# Altium PCB solar_power.PcbDoc
Units mm, origin at the board's own origin, x right, y up, seen from the top; angles counter-clockwise.
Board outline 72.9 x 100 mm, 2 copper layers (Top Layer, Bottom Layer); 84 components, 44 nets, 237 pads, 491 vias.
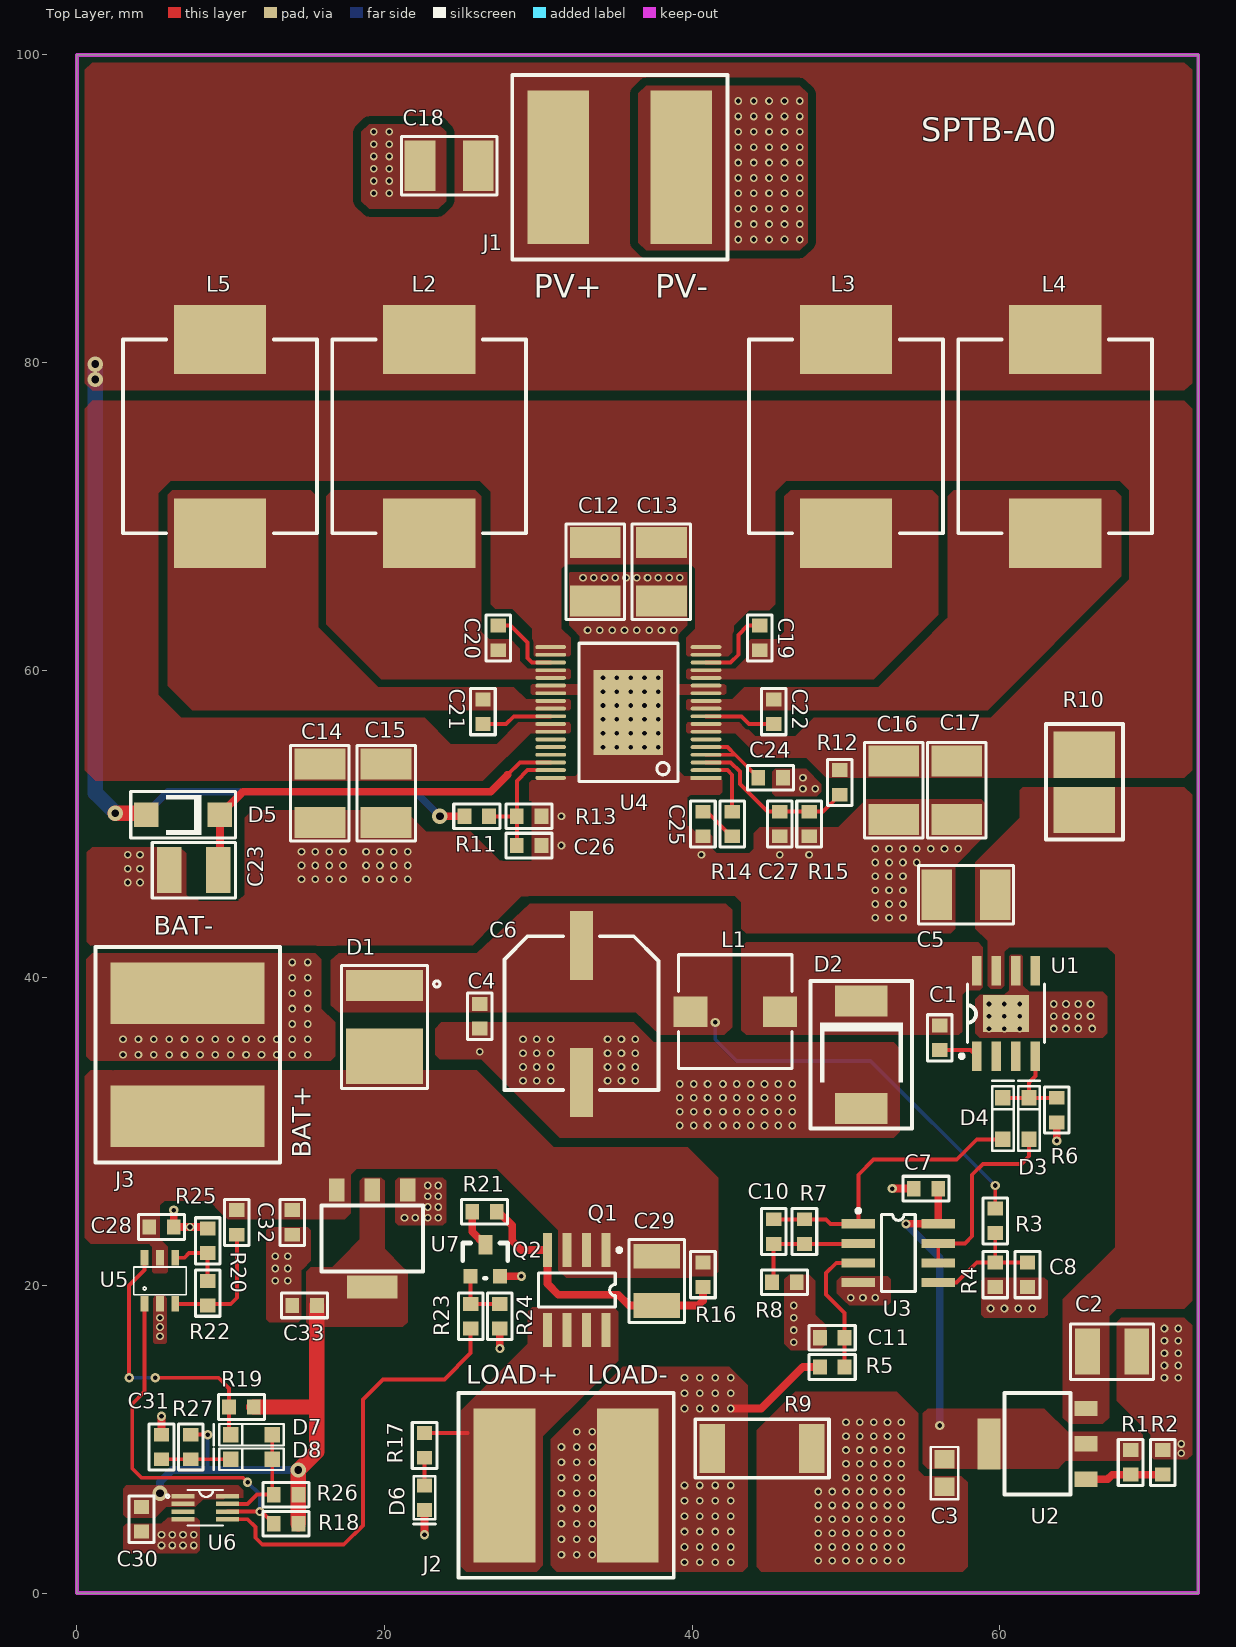
[diagram p0: Top Layer view]
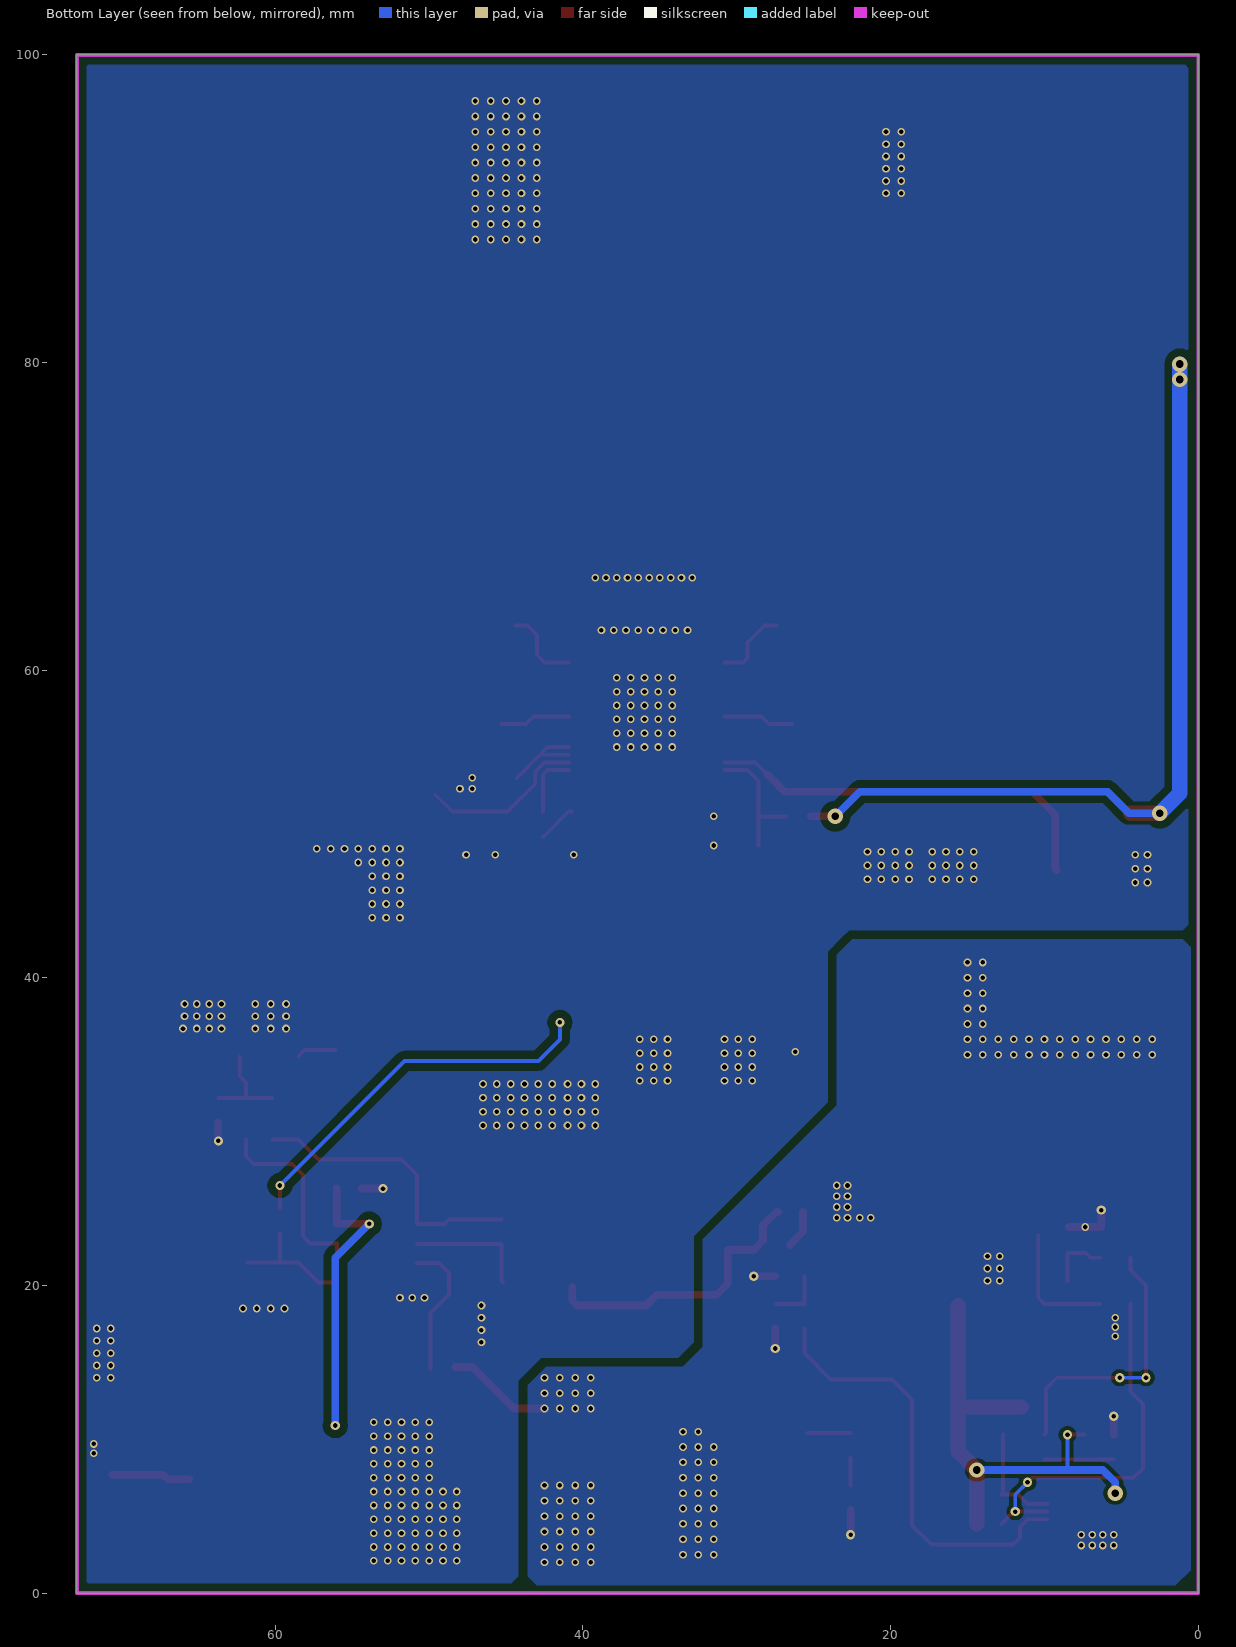
[diagram p1: Bottom Layer view, seen from below]

## Layer stack, top to bottom
Top Layer: signal copper 0.0356
Dielectric: dielectric 0.32, FR-4, Dk 4.8
Bottom Layer: signal copper 0.0356

## Board outline
0,0 72.9,0 72.9,100 0,100

## Design rules (kind name [scope] priority, off if disabled: settings)
Clearance Clearance_5 [InComponent('U1')] p1: gap=0.254
Clearance Clearance_2 [InComponent('U6')] p2: gap=0.127
Clearance Clearance_1 [InComponent('U4')] p3: gap=0.127
Clearance [All] p4: gap=0.254
ComponentClearance [All] p1: gap=0 collisioncheckmode=3 verticalgap=0 showdistances=FALSE
PolygonConnect [All] p1: connectstyle=Direct reliefconductorwidth=0.254 reliefentries=4 polygonreliefangle="90 Angle"
RoutingVias [All] p1: holewidth=0.3 width=0.6 viastyle="Through Hole" minholewidth=0.3 minwidth=0.6 maxholewidth=0.3 maxwidth=0.6
SilkscreenOverComponentPads [All] p1: minsilkscreentomaskgap=0.254
SolderMaskExpansion [All] p1: expansion=0.102
Width [All] p1: maxlimit=4 minlimit=0.254 preferedwidth=0.254 minimp=50.000000 maximp=50.000000 favimp=50.000000
26 further rules are at their usual default settings.

## Components (designator, comment, footprint, x,y, rotation, side; value= is the part's Value field where it differs from the comment)
C1 "0.01uF" 0603 56.1,36.1 r0 top
C2 "1uF/50V" 1210 68.9,15.7 r180 top
C3 "1uF/16V" 0805 56.4,6.9 r90 top
C4 "0.1uF" 0603 26.2,37.5 r180 top
C5 "4.7uF/50V" 1812 59.7,45.4 r180 top
C6 "220uF/50V" DL-10*10.5 32.8,37.7 r0 top
C7 "0.1uF" 0603 55.2,26.3 r90 top
C8 "220pF" 0603 61.8,20.7 r0 top
C10 "220pF" 0603 45.3,23.5 r180 top
C11 "0.1uF" 0603 49.1,16.6 r270 top
C12 "4.7uF/50V" 1812 33.7,64.5 r90 top
C13 "4.7uF/50V" 1812 38,64.5 r90 top
C14 "4.7uF/50V" 1812 15.8,50.1 r90 top
C15 "4.7uF/50V" 1812 20.1,50.1 r90 top
C16 "4.7uF/50V" 1812 53.1,50.3 r90 top
C17 "4.7uF/50V" 1812 57.2,50.3 r90 top
C18 "4.7uF/50V" 1812 22.3,92.8 r0 top
C19 "0.1uF" 0603 44.4,62.1 r180 top
C20 "0.1uF" 0603 27.4,62.1 r180 top
C21 "0.1uF" 0603 26.4,57.3 r180 top
C22 "0.1uF" 0603 45.3,57.3 r180 top
C23 "1uF/50V" 1210 6,47 r0 top
C24 "0.47uF" 0603 45.1,53 r90 top
C25 "0.022uF" 0603 40.7,50 r0 top
C26 "220pF" 0603 29.4,48.6 r270 top
C27 "220pF" 0603 45.7,50 r180 top
C28 "0.1uF" 0603 5.5,23.8 r270 top
C29 "1uF/50V" 1210 37.7,18.7 r90 top
C30 "0.1uF" 0603 4.2,4.8 r180 top
C31 "0.1uF" 0603 5.5,9.5 r180 top
C32 "0.1uF" 0603 14,24.1 r180 top
C33 "1uF/6.3V" 0603 14.8,18.7 r90 top
D1 "SPV1001N30" SPV1001 20,34.9 r0 top
D2 "MBR360" DO214AB 51,31.5 r90 top
D3 "1N5819HW" 1N5819 61.9,32.2 r270 top
D4 "1N5819HW" 1N5819 60.2,32.2 r270 top
D5 "STPS160U" B320A 4.5,50.6 r0 top
D6 "LED RED" LED0603 22.6,7 r0 top
D7 "1N5819HW" 1N5819 10,10.3 r0 top
D8 "1N5819HW" 1N5819 10,8.7 r0 top
J1 "PV" T-2PIN 31.3,92.7 r90 top
J2 "Voltage Output" T-2PIN 27.8,7 r90 top
J3 "Battery" T-2PIN 7.2,39 r0 top
L1 "8.2uH/3A" IND_8.2UH_3A 42.8,37.8 r90 top
L2 "47uH/3A" IND-47UH-3A 22.9,75.2 r270 top
L3 "47uH/3A" IND-47UH-3A 50,75.2 r90 top
L4 "47uH/3A" IND-47UH-3A 63.6,75.2 r90 top
L5 "47uH/3A" IND-47UH-3A 9.3,75.2 r270 top
Q1 "AO4435" SO8 32.5,19.7 r180 top
Q2 "S9014" NPN 25.6,20.6 r0 top
R1 "1K/1%" 0603 68.5,8.5 r0 top
R2 "8.2K/1%" 0603 70.6,8.5 r180 top
R3 "8.2K/1%" 0603 59.7,24.2 r0 top
R4 "1K/1%" 0603 59.7,20.7 r0 top
R5 "1K" 0603 49.1,14.7 r90 top
R6 "150K" 0603 63.7,31.4 r180 top
R7 "6.8K/1%" 0603 47.3,23.5 r180 top
R8 "1K/1%" 0603 46,20.2 r270 top
R9 "0.1/1W" 2512 41.3,9.4 r0 top
R10 "0" BREAK 65.5,54.5 r0 top
R11 "3.3M" 0603 26,50.5 r90 top
R12 "3.9M" 0603 49.6,52.7 r180 top
R13 "110K" 0603 29.4,50.5 r270 top
R14 "1K" 0603 42.6,50 r0 top
R15 "110K" 0603 47.6,50 r180 top
R16 "100K" 0603 40.7,20.7 r180 top
R17 "5.1K" 0603 22.6,9.6 r180 top
R18 "100K" 0603 13.6,4.5 r270 top
R19 "100K" 0603 10.7,12.1 r270 top
R20 "2M/1%" 0603 10.4,24.1 r0 top
R21 "10K" 0603 26.5,24.8 r90 top
R22 "10K/1%" 0603 8.5,19.5 r180 top
R23 "47K" 0603 25.6,18 r0 top
R24 "47K" 0603 27.5,18 r180 top
R25 "68K/1%" 0603 8.5,22.9 r180 top
R26 "100K" 0603 13.6,6.4 r270 top
R27 "100K" 0603 7.4,9.5 r0 top
U1 "LM22676MR-ADJ" PSO8 58.5,34.9 r0 top
U2 "LM317EMP" LM317 65.6,9.7 r90 top
U3 "LM258D" SO8 53.4,22.1 r270 top
U4 "SPV1020" POWERSSOP36 40.9,53 r180 top
U5 "TPS3700-Q1" SOT23-6 4.4,18.8 r0 top
U6 "NC7SZ74K8X" US8 7,6.3 r270 top
U7 "AMS1117-3.3" AMS1117 19.2,26.2 r180 top

## Footprints (in the part's own frame and the unit in brackets; to place one, negate y for a bottom-side part, rotate by r counter-clockwise, add the part's x,y. Pads: shape width x height; smd on the part's side, far side on the other; paste and mask are expansions set on the pad)
1N5819 [mm]
  rect 1x1 smd: 1(2.7,0) 2(0,0)
  silkscreen extent -1.1,-0.7 3.45,0.7
0603 [mm]
  rect 1x0.9 smd: 1(0,0.8) 2(0,-0.8)
  silkscreen extent -0.8,-1.5 0.8,1.5
0805 [mm]
  rect 1.2x1.3 smd: 1(0,0) 2(1.8,0)
  silkscreen extent -0.8,-0.9 2.6,0.9
1210 [mm]
  rect 1.6x3 smd: 1(0,0) 2(3.2,0)
  silkscreen extent -1.1,-1.8 4.3,1.8
1812 [mm]
  rect 2x3.3 smd: 1(0,0) 2(3.8,0)
  silkscreen extent -1.2,-1.9 5,1.9
2512 [mm]
  rect 1.65x3.2 smd: 1(0,0) 2(6.48,0)
  silkscreen extent -1.1,-1.9 7.6,1.9
AMS1117 [mm]
  rect 1x1.5 smd: 1(-2.3,0) 2(0,0) 3(2.3,0)
  rect 3.3x1.5 smd: 4(0,6.3)
  silkscreen extent -3.3,1 3.3,5.3
B320A [mm]
  rect 1.6x1.6 smd: 1(0,0) 2(4.8,0)
  silkscreen extent -1,-1.5 5.8,1.5
BREAK [mm]
  rect 4x3 smd: 1(0,0) 2(0,-3.6)
  silkscreen extent -2.5,-5.5 2.5,2
DL-10*10.5 [mm]
  rect 1.5x4.5 smd: 1(0,4.4) 2(0,-4.5)
  silkscreen extent -5,-5 5,5
DO214AB [mm]
  rect 2x3.4 smd: 1(7,0) 2(0,0)
  silkscreen extent -1.3,-3.3 8.3,3.3
IND-47UH-3A [mm]
  rect 4.5x6 smd: 1(-6.3,0) 2(6.3,0)
  silkscreen extent -6.3,-6.3 6.3,6.3
IND_8.2UH_3A [mm]
  rect 2x2.2 smd: 1(0,-2.9) 2(0,2.9)
  silkscreen extent -3.7,-3.7 3.7,3.7
LED0603 [mm]
  rect 1x0.9 smd: 1(0,0) 2(0,-1.6)
  silkscreen extent -0.7,-2.5 0.7,0.6
LM317 [mm]
  rect 1x1.5 smd: 1(-2.3,0) 2(2.3,0) 3(0,0)
  rect 3.3x1.5 smd: 3(0,6.3)
  silkscreen extent -3.3,1 3.3,5.3
NPN [mil]
  rect 36x50 smd: 1(38,80)
  rect 36x36 smd: 2(0,0) 3(75,0)
  silkscreen extent -20,-5 95,85
POWERSSOP36 [mm]
  rect 2x0.25 smd: 1(0,0)
  oval 2x0.25 smd: 2(0,-0.5) 3(0,-1) 4(0,-1.5) 5(0,-2) 6(0,-2.5) 7(0,-3) 8(0,-3.5) 9(0,-4) 10(0,-4.5) 11(0,-5) 12(0,-5.5) 13(0,-6) 14(0,-6.5) 15(0,-7) 16(0,-7.5) 17(0,-8) 18(0,-8.5) 19(10.1,-8.5) 20(10.1,-8) 21(10.1,-7.5) 22(10.1,-7) 23(10.1,-6.5) 24(10.1,-6) 25(10.1,-5.5) 26(10.1,-5) 27(10.1,-4.5) 28(10.1,-4) 29(10.1,-3.5) 30(10.1,-3) 31(10.1,-2.5) 32(10.1,-2) 33(10.1,-1.5) 34(10.1,-1) 35(10.1,-0.5) 36(10.1,0)
  rect 4.5x5.5 smd: ""(5.05,-4.25)
  silkscreen extent 1.84,-8.75 8.26,0.25
PSO8 [mm]
  rect 0.6x1.9 smd: 1(0,0) 2(1.27,0) 3(2.54,0) 4(3.81,0) 5(3.81,5.56) 6(2.54,5.56) 7(1.27,5.56) 8(0,5.56)
  rect 3x2.4 smd: 9(1.9,2.78)
  silkscreen extent -1.1,-0.11 4.4,4.7
SO8 [mm] "Small Outline; 8 Leads; Body Width 3.9 mm; Pitch 1.27 mm"
  rect 0.6x2.2 smd: 1(-1.905,-2.6) 2(-0.635,-2.6) 3(0.635,-2.6) 4(1.905,-2.6) 5(1.905,2.6) 6(0.635,2.6) 7(-0.635,2.6) 8(-1.905,2.6)
  silkscreen extent -2.88,-2.72 2.5,1.1
SOT23-6 [mm]
  rect 0.5x1 smd: 1(0,0) 2(1,0) 3(2,0) 4(2,3) 5(1,3) 6(0,3)
  silkscreen extent -0.7,0.6 2.7,2.4
SPV1001 [mm]
  rect 5x2 smd: 1(0,4.6)
  rect 5x3.6 smd: 2(0,0)
  silkscreen extent -2.8,-2.1 3.6,5.9
T-2PIN [mm]
  rect 10x4 smd: 1(0,0) 2(0,-8)
  silkscreen extent -6,-11 6,3
US8 [mm]
  rect 0.3x1.5 smd: 1(0,-0.1) 2(0.5,-0.1) 3(1,-0.1) 4(1.5,-0.1) 5(1.5,2.8) 6(1,2.8) 7(0.5,2.8) 8(0,2.8)
  silkscreen extent -0.4,-1.2 1.9,2.5

## Part data
C1 C2 C3 C4 C7 C8 C10 C11 C12 C13 C14 C15 C16 C17 C18 C19 C20 C21 C22 C23 C24 C25 C26 C27 C28 C30: library part Cap, "Capacitor"
C5: library part CAP, "Capacitor"
C6: library part "CAP WP"
C29 C31 C32 C33: library part "CAP NP_Dup2"
D1 D5: library part Diode, "Default Diode"
D2: library part 1N4148WS-7-F_SOD323-2
D3 D4 D7 D8: library part "Diode 11DQ03", "Schottky Rectifier"
D6: library part LN01401_1
J1 J2 J3: library part "Header 2", "Header, 2-Pin"
L1 L2 L3 L4 L5: library part 4.7UH_CDH2D09BNP-4R7MC_0.7A_20%
Q1: library part SI4431DY, "P-Channel 30V (D-S)  MOSFET"
Q2: library part MMBT3904_NL_SOT23-3
R1 R2 R3 R4 R5 R6 R7 R8 R9 R10 R11 R12 R13 R14 R15 R18 R19 R20 R22 R25 R26 R27: library part Res3, "Resistor"
R16 R17 R21 R23 R24: library part CR16-1003FM
U1: library part LM22670_0
U2: library part "LM317K STEEL", "3-Terminal Adjustable Regulator, 3-pin TO-3"
U3: library part LM258H, "Low Power Dual Operational Amplifier, 8-pin TO-99"
U6: library part NC7SZ74-US8_0, "IC;NC7SZ74,D-TYPE FLIP-FLOP,US8"
U7: library part LT1963EST-1_4.8

## Via types
v1: diameter 0.5, hole 0.3, Top Layer to Bottom Layer, tented both sides, 469 vias
v2: diameter 0.6, hole 0.3, Top Layer to Bottom Layer, tented both sides, 14 vias
v3: diameter 1, hole 0.5, Top Layer to Bottom Layer, tented both sides, 6 vias
v4: diameter 0.6, hole 0.3, Top Layer to Bottom Layer, 2 vias

## Nets (pads, with @x,y where several pads share a name; then routed paths per layer and width w, separated by ;. In a path a pad name is that pad's centre, name@x,y a point inside that pad or via, vN(x,y) a via of type N, cw(c..) or ccw(c..) an arc to the next point about the centre after c; other vN are vias at no path point)
+3.3V: C30.2 C33.2 R18.1 R19.1 R26.1 R27.1 U6.1 U6.2 U6.8 U7.2 U7.4 | length 32.3
  Top Layer w0.254: R27.1 v2(8.5,10.3)
  Top Layer w1: R19.1 15.6,12.1 ; R18.1 R26.1 v3(14.4,8) 15.6,9.2 15.6,12.1 ; C33.2 15.6,12.1
  Bottom Layer w0.254: v2(8.5,10.3) 8.5,8.104 8.6,8.004
  Bottom Layer w0.5: v3(5.4,6.5) 5.4,7.2 6.204,8.004 8.6,8.004 14.396,8.004 v3(14.4,8)
+12V: C3.2 C7.2 R1.1 U2.3 U3.8 | length 18.4
  Top Layer w0.5: v2(53.9,24) 53.905,24.005 U3.8 C7.2
  Bottom Layer w0.5: v2(53.9,24) 56.1,21.8 v2(56.1,10.9)
BGND: C28.1 C30.1 C31.2 C32.1 C33.1 D6.2 J2.2 J3.1 Q2.3 R5.1 R9.1 R24.1 R25.2 U5.2 U6.4 U7.1 | length 15.6
  Top Layer w0.5: C31.2 v4(5.5,11.5) ; v4(6.3,24.9) C28.1 v1(7.35,23.8) R25.2@8.4,23.8 ; v2(22.6,3.8) D6.2 ; v2(27.5,15.9) R24.1 ; Q2.3 v2(28.9,20.6) ; v1(42.5,12) 44.5,12 47.2,14.7 R5.1
  other v1: 39.5,2 40.5,2 41.5,2 42.5,2 31.5,2.5 32.5,2.5 33.5,2.5 39.5,3 40.5,3 41.5,3 42.5,3 5.5,3.1 6.2,3.1 6.9,3.1 7.6,3.1 31.5,3.5 32.5,3.5 33.5,3.5 5.5,3.8 6.2,3.8 6.9,3.8 7.6,3.8 39.5,4 40.5,4 41.5,4 42.5,4 31.5,4.5 32.5,4.5 33.5,4.5 39.5,5 40.5,5 41.5,5 42.5,5 31.5,5.5 32.5,5.5 33.5,5.5 39.5,6 40.5,6 41.5,6 42.5,6 31.5,6.5 32.5,6.5 33.5,6.5 39.5,7 40.5,7 41.5,7 42.5,7 31.5,7.5 32.5,7.5 33.5,7.5 31.5,8.5 32.5,8.5 33.5,8.5 31.5,9.5 32.5,9.5 33.5,9.5 32.5,10.5 33.5,10.5 39.5,12 40.5,12 41.5,12 39.5,13 40.5,13 41.5,13 42.5,13 39.5,14 40.5,14 41.5,14 42.5,14 5.4,16.7 5.4,17.3 5.4,17.9 12.9,20.3 13.7,20.3 12.9,21.1 13.7,21.1 12.9,21.9 13.7,21.9 21.3,24.4 22,24.4 22.8,24.4 23.5,24.4 22.8,25.1 23.5,25.1 22.8,25.8 23.5,25.8 22.8,26.5 23.5,26.5 3,35 4,35 5,35 6,35 7,35 8,35 9,35 10,35 11,35 12,35 13,35 14,35 15,35 3,36 4,36 5,36 6,36 7,36 8,36 9,36 10,36 11,36 12,36 13,36 14,36 15,36 14,37 15,37 14,38 15,38 14,39 15,39 14,40 15,40 14,41 15,41
CB4: C22.1 U4.9 | length 4.6
  Top Layer w0.254: U4.9 43.2,57 43.7,56.5 C22.1
CLR: R18.2 U5.1 U6.6 | length 24.5
  Top Layer w0.254: U5.1 4.4,13.1 3.6,12.3 3.6,8.1 4.2,7.5 10.8,7.5 v2(11.1,7.2) ; U6.6 v2(11.9,5.3) 12,5.3 R18.2
  Bottom Layer w0.254: v2(11.1,7.2) 11.9,6.4 v2(11.9,5.3)
FB: D3.2 D4.2 R6.2 U1.4 | length 6.4
  Top Layer w0.254: D4.2 D3.2 ; U1.4 62.31,33.61 61.9,33.2 D3.2 ; R6.2 D3.2
GND: C2.1 C3.1 C4.1 C5.2 C6.2 C7.1 C8.2 C11.2 C12.1 C13.1 C14.1 C15.1 C16.1 C17.1 C18.1 C23.1 C24.2 C25.2 C26.1 C27.1 D2.2 J1.2 R2.2 R4.2 R6.1 R8.1 R9.2 R13.1 R15.1 U1.6 U1.9 U3.4 U4. U4.1 U4.12 U4.13 U4.24 U4.25 U4.36 | length 2.6
  Top Layer w0.5: v2(53,26.3) C7.1 ; v2(63.7,29.4) R6.1
  other v1: 48.2,2.1 49.1,2.1 50,2.1 50.9,2.1 51.8,2.1 52.7,2.1 53.6,2.1 48.2,3 49.1,3 50,3 50.9,3 51.8,3 52.7,3 53.6,3 48.2,3.9 49.1,3.9 50,3.9 50.9,3.9 51.8,3.9 52.7,3.9 53.6,3.9 48.2,4.8 49.1,4.8 50,4.8 50.9,4.8 51.8,4.8 52.7,4.8 53.6,4.8 48.2,5.7 49.1,5.7 50,5.7 50.9,5.7 51.8,5.7 52.7,5.7 53.6,5.7 48.2,6.6 49.1,6.6 50,6.6 50.9,6.6 51.8,6.6 52.7,6.6 53.6,6.6 50,7.5 50.9,7.5 51.8,7.5 52.7,7.5 53.6,7.5 50,8.4 50.9,8.4 51.8,8.4 52.7,8.4 53.6,8.4 71.8,9.1 50,9.3 50.9,9.3 51.8,9.3 52.7,9.3 53.6,9.3 71.8,9.7 50,10.2 50.9,10.2 51.8,10.2 52.7,10.2 53.6,10.2 50,11.1 50.9,11.1 51.8,11.1 52.7,11.1 53.6,11.1 70.7,14 71.6,14 70.7,14.8 71.6,14.8 70.7,15.6 71.6,15.6 46.6,16.3 70.7,16.4 71.6,16.4 46.6,17.1 70.7,17.2 71.6,17.2 46.6,17.9 59.4,18.5 60.3,18.5 61.2,18.5 62.1,18.5 46.6,18.7 50.3,19.2 51.1,19.2 51.9,19.2 39.2,30.4 40.1,30.4 41,30.4 42,30.4 42.9,30.4 43.8,30.4 44.7,30.4 45.6,30.4 46.5,30.4 39.2,31.3 40.1,31.3 41,31.3 42,31.3 42.9,31.3 43.8,31.3 44.7,31.3 45.6,31.3 46.5,31.3 39.2,32.2 40.1,32.2 41,32.2 42,32.2 42.9,32.2 43.8,32.2 44.7,32.2 45.6,32.2 46.5,32.2 39.2,33.1 40.1,33.1 41,33.1 42,33.1 42.9,33.1 43.8,33.1 44.7,33.1 45.6,33.1 46.5,33.1 29,33.3 29.9,33.3 30.8,33.3 34.5,33.3 35.4,33.3 36.3,33.3 29,34.2 29.9,34.2 30.8,34.2 34.5,34.2 35.4,34.2 36.3,34.2 29,35.1 29.9,35.1 30.8,35.1 34.5,35.1 35.4,35.1 36.3,35.1 26.2,35.2 29,36 29.9,36 30.8,36 34.5,36 35.4,36 36.3,36 59.3,36.7 60.3,36.7 61.3,36.7 63.5,36.7 64.3,36.7 65.1,36.7 66,36.7 59.3,37.5 60.3,37.5 61.3,37.5 63.5,37.5 64.3,37.5 65.1,37.5 65.9,37.5 59.3,38.3 60.3,38.3 61.3,38.3 63.5,38.3 64.3,38.3 65.1,38.3 65.9,38.3 51.9,43.9 52.8,43.9 53.7,43.9 51.9,44.8 52.8,44.8 53.7,44.8 51.9,45.7 52.8,45.7 53.7,45.7 3.3,46.2 4.1,46.2 14.6,46.4 15.5,46.4 16.4,46.4 17.3,46.4 18.8,46.4 19.7,46.4 20.6,46.4 21.5,46.4 51.9,46.6 52.8,46.6 53.7,46.6 3.3,47.1 4.1,47.1 14.6,47.3 15.5,47.3 16.4,47.3 17.3,47.3 18.8,47.3 19.7,47.3 20.6,47.3 21.5,47.3 51.9,47.5 52.8,47.5 53.7,47.5 54.6,47.5 3.3,48 4.1,48 40.6,48 45.7,48 47.6,48 14.6,48.2 15.5,48.2 16.4,48.2 17.3,48.2 18.8,48.2 19.7,48.2 20.6,48.2 21.5,48.2 51.9,48.4 52.8,48.4 53.7,48.4 54.6,48.4 55.5,48.4 56.4,48.4 57.3,48.4 31.5,48.6 31.5,50.5 47.2,52.3 48,52.3 47.2,53 34.2,55 35.1,55 36,55 36.9,55 37.8,55 34.2,55.9 35.1,55.9 36,55.9 36.9,55.9 37.8,55.9 34.2,56.8 35.1,56.8 36,56.8 36.9,56.8 37.8,56.8 34.2,57.7 35.1,57.7 36,57.7 36.9,57.7 37.8,57.7 34.2,58.6 35.1,58.6 36,58.6 36.9,58.6 37.8,58.6 34.2,59.5 35.1,59.5 36,59.5 36.9,59.5 37.8,59.5 33.2,62.6 34,62.6 34.8,62.6 35.6,62.6 36.4,62.6 37.2,62.6 38,62.6 38.8,62.6 32.9,66 33.6,66 34.3,66 35,66 35.7,66 36.4,66 37.1,66 37.8,66 38.5,66 39.2,66 43,88 44,88 45,88 46,88 47,88 43,89 44,89 45,89 46,89 47,89 43,90 44,90 45,90 46,90 47,90 19.3,91 20.3,91 43,91 44,91 45,91 46,91 47,91 19.3,91.8 20.3,91.8 43,92 44,92 45,92 46,92 47,92 19.3,92.6 20.3,92.6 43,93 44,93 45,93 46,93 47,93 19.3,93.4 20.3,93.4 43,94 44,94 45,94 46,94 47,94 19.3,94.2 20.3,94.2 19.3,95 20.3,95 43,95 44,95 45,95 46,95 47,95 43,96 44,96 45,96 46,96 47,96 43,97 44,97 45,97 46,97 47,97
LX4: C22.2 L4.1 U4.10 U4.11
MPPT-OUT: C2.2 C5.1 R10.2 U1.7 U2.2
NetC1_1: C1.1 D2.1 L1.1 U1.8
NetC1_2: C1.2 U1.1 | length 2.6
  Top Layer w0.254: C1.2 58.1,35.3 U1.1
NetC8_1: C8.1 R3.2 R4.1 U3.5 | length 8.2
  Top Layer w0.254: U3.5 57.195,20.195 58.5,21.5 R4.1 ; R3.2 R4.1 ; C8.1 R4.1
NetC10_1: C10.1 R7.1 R8.2 U3.2 | length 8.1
  Top Layer w0.254: R8.2 45.3,20.3 C10.1 R7.1 50.765,22.7 U3.2
NetC10_2: C10.2 D4.1 R7.2 U3.1 | length 19.2
  Top Layer w0.254: C10.2 R7.2 48.7,24.3 48.995,24.005 U3.1 50.8,27.2 51.8,28.2 57.2,28.2 58.5,29.5 D4.1
NetC11_1: C11.1 R5.2 U3.3 | length 9.1
  Top Layer w0.254: R5.2@49.9,14.6 49.9,18.2 48.7,19.4 48.7,20.8 49.365,21.465 U3.3
NetC19_1: C19.1 L3.1 U4.14 U4.15
NetC19_2: C19.2 U4.16 | length 5.3
  Top Layer w0.254: U4.16 42.5,60.5 43,61 43,62.3 43.6,62.9 C19.2
NetC20_1: C20.1 L2.2 U4.22 U4.23
NetC20_2: C20.2 U4.21 | length 5
  Top Layer w0.254: C20.2 28.2,62.9 29.3,61.8 29.3,60.8 29.6,60.5 U4.21
NetC21_1: C21.1 U4.28 | length 4.6
  Top Layer w0.254: C21.1 27.9,56.5 28.4,57 U4.28
NetC21_2: C21.2 L5.2 U4.26 U4.27
NetC24_1: C24.1 U4.4 U4.5 | length 6.1
  Top Layer w0.254: U4.4 42.8,54.5 ; U4.5 42.3,55 42.8,54.5 ; C24.1 42.8,54.5
NetC25_1: C25.1 R14.2 | length 2.6
  Top Layer w0.254: C25.1 40.948,50.8 42.548,49.2 R14.2
NetC29_1: C29.1 Q1.4 R16.1 R21.2 | length 18.8
  Top Layer w0.5: R21.2 27.4,24.8 28.3,23.9 28.3,22.9 28.9,22.3 Q1.4 30.595,20.105 31.3,19.4 35.2,19.4 35.9,18.7 C29.1 40.4,18.7 40.7,19 R16.1
NetC31_1: C31.1 D8.2 R27.2 | length 4.5
  Top Layer w0.254: C31.1 D8.2
NetD3_1: D3.1 U3.6 U3.7 | length 13
  Top Layer w0.254: U3.6 U3.7 57.735,22.735 58.2,23.2 58.2,27.2 58.9,27.9 61.4,27.9 61.9,28.4 D3.1
NetD6_1: D6.1 R17.1 | length 1.8
  Top Layer w0.254: D6.1 R17.1
NetD7_1: D7.1 D8.1 R26.2 U6.7 | length 7.2
  Top Layer w0.254: U6.7 11.1,5.8 11.7,6.4 R26.2 12.7,6.5 D8.1 D7.1
NetJ2_1: J2.1 Q1.5 Q1.6 Q1.7 Q1.8 R17.2 | length 2.8
  Top Layer w0.254: R17.2 25.4,10.4
NetQ2_1: Q2.1 R21.1 | length 2.5
  Top Layer w0.5: R21.1 25.7,23.497 Q2.1
NetQ2_2: Q2.2 R23.1 R24.2 | length 3.7
  Top Layer w0.254: Q2.2 R23.1 R24.2
NetR1_2: R1.2 R2.1 U2.1 | length 5.1
  Top Layer w0.5: U2.1 67,7.4 67.3,7.7 R2.1
NetR14_1: R14.1 U4.2 | length 4.2
  Top Layer w0.254: U4.2 42.3,53.5 42.6,53.2 R14.1
NetR20_2: R20.2 R22.1 U5.3 | length 8.3
  Top Layer w0.254: U5.3 10,18.8 10.4,19.2 R20.2
NetR22_2: R22.2 R25.1 U5.4 | length 4
  Top Layer w0.254: U5.4 7,21.8 7.3,22.1 R25.1 R22.2
OUTB: D7.2 R19.2 U5.6 | length 18
  Top Layer w0.254: v2(3.4,14) 3.4,20 4.4,21 U5.6 ; v2(5.1,14) 9.2,14 9.9,13.3 R19.2 9.9,10.4 D7.2
  Bottom Layer w0.254: v2(3.4,14) v2(5.1,14)
PWR-CTL: R23.2 U6.5 | length 28.5
  Top Layer w0.254: U6.5 11.1,4.8 11.6,4.3 11.6,3.6 12.05,3.15 17.35,3.15 18.6,4.4 18.6,12.6 19.9,13.9 23.9,13.9 25.6,15.6 R23.2
VBAT: C28.2 C29.2 C32.2 D1.2 J3.2 Q1.1 Q1.2 Q1.3 R16.2 R20.1 U5.5 U7.3
VCC: C23.2 D5.2 U4.34 | length 26.5
  Top Layer w0.254: 28,53.2 28.8,54 U4.34
  Top Layer w0.5: C23.2 9.3,47.1 D5.2 10.8,52.1 26.9,52.1 28,53.2
VIN: C18.2 D5.1 J1.1 L2.1 L3.2 L4.2 L5.1 R11.1 | length 55.6
  Top Layer w0.5: v3(23.6,50.5) R11.1
  Top Layer w1: v3(2.5,50.7) D5.1@4.4,50.7
  Bottom Layer w0.5: v3(2.5,50.7) 4.5,50.7 5.9,52.1 22,52.1 v3(23.6,50.5)
  Bottom Layer w1: v3(1.2,79.9) 1.2,52 v3(2.5,50.7)
  other v3: 1.2,78.9
VIN-SNS: C26.2 R11.2 R13.2 U4.35 | length 8.5
  Top Layer w0.254: R11.2 R13.2 ; C26.2 R13.2 ; U4.35 29.3,53.5 28.6,52.8 R13.2
VOUT: C12.2 C13.2 C14.2 C15.2 C16.2 C17.2 R10.1 R12.2 U4.7 U4.8 U4.17 U4.18 U4.19 U4.20 U4.29 U4.30
VOUT-SNS: C27.2 R12.1 R15.2 U4.3 | length 10.9
  Top Layer w0.254: U4.3 42.5,54 43.1,53.4 43.1,52.6 44.9,50.8 C27.2 R15.2 48.5,50.8 R12.1
VREG: C4.2 C6.1 D1.1 L1.2 R3.1 | length 24.7
  Top Layer w0.254: R3.1 v2(59.7,26.5)
  Bottom Layer w0.254: v2(41.5,37.1) 41.5,36 42.9,34.6 51.6,34.6 v2(59.7,26.5)
pads on no net: U1.2 U1.3 U1.5 U4.6 U4.31 U4.32 U4.33 U6.3

## Polygon pours and split planes (outlines as drawn)
+12V on Top Layer "Top Layer-No Net" (solid, remove dead copper, pour order 51): 55.7,8.1 60.6,8.1 60.9,8.4 60.9,10.1 60.9,11.7 60.6,12 55.3,12 55,11.7 55,8.4 55.3,8.1
VREG on Top Layer "Top Layer-No Net" (solid, remove dead copper, pour order 48): 42.6,36.783 42.6,44.414 42.182,44.8 37.484,44.8 29.446,44.8 26,41.613 17.022,41.613 17.022,41.612 16.5,41.13 16.5,38.232 17.022,37.749 36.336,37.749 37.902,36.3 42.078,36.3
NetC1_1 on Top Layer "Top Layer-No Net" (solid, remove dead copper, pour order 46): 56.197,36.3 57.34,36.3 57.548,36.5 57.548,38.9 57.756,39.1 57.86,39.2 58.484,39.2 58.692,39.2 58.9,39.4 58.9,42 58.588,42.3 43.512,42.3 43.2,42 43.2,36.6 43.512,36.3
MPPT-OUT on Top Layer "Top Layer-No Net" (solid, remove dead copper, pour order 44): 63.2,52.4 72,52.4 72.5,51.9 72.5,42 72.5,19 72,18.5 67.6,18.5 67.1,18 67.1,11.4 66.7,11 64.8,11 64.5,11 64.1,11.4 64.1,19.1 67.5,22.5 67.5,41.5 67,42 60.6,42 60.3,41.7 60.3,39.5 60.1,39.3 59.5,39.3 59.4,39.3 59.2,39.5 59.2,42.4 58.4,43.2 58.4,47.5 59.8,48.9 61.3,50.4 61.3,51.5 61.3,52.2 61.5,52.4
GND on Top Layer "Top Layer-No Net" (solid, remove dead copper, pour order 41): 37.8,98 47,98 47.5,97.5 47.5,87.8 47,87.3 37,87.3 36.5,87.8 36.5,97.5 37,98
GND on Top Layer "Top Layer-No Net" (solid, remove dead copper, pour order 42): 20.5,95.5 23.5,95.5 24,95 24,90.5 23.5,90 19,90 18.5,90.5 18.5,95 19,95.5
VIN on Top Layer "Top Layer-No Net" (solid, remove dead copper, pour order 43): 1,99.5 0.5,99.047 0.5,78.653 1,78.2 72,78.2 72.5,78.653 72.5,99.047 72,99.5
NetC21_2 on Top Layer "Top Layer-No Net" (solid, remove dead copper, pour order 49): 30,58.1 32,58.1 32.1,58 32.1,57.5 32,57.4 27.1,57.4 7.5,57.4 5.9,59 5.9,71.4 6.2,71.7 15.2,71.7 15.7,71.2 15.7,69.2 15.7,62.8 19.6,58.9 28.4,58.9 29.2,58.1
NetC20_1 on Top Layer "Top Layer-No Net" (solid, remove dead copper, pour order 52): 30,60.1 31.8,60.1 32,60.1 32.1,60 32.1,59.5 32,59.4 19.8,59.4 18.1,61.1 16.2,63 16.2,69.6 16.2,71.3 16.6,71.7 25.9,71.7 26.3,71.3 26.3,62.5 26.8,62 28.2,62 28.7,61.5 28.8,61.4 28.8,60.6 29.3,60.1
NetC19_1 on Top Layer "Top Layer-No Net" (solid, remove dead copper, pour order 54): 40.5,60.1 42.8,60.1 43.1,60.4 43.6,60.9 43.6,61.7 43.6,61.8 43.8,62 44.8,62 45.5,62 46,62.5 46,71.3 46.4,71.7 55.6,71.7 56,71.3 56,63.6 51.8,59.4 39.7,59.4 39.6,59.5 39.6,60 39.7,60.1
LX4 on Top Layer "Top Layer-No Net" (solid, remove dead copper, pour order 56): 40.3,58.1 42.5,58.1 42.6,58.1 43.4,58.9 43.7,58.9 52.1,58.9 54.7,61.5 56.5,63.3 56.6,63.4 56.6,63.9 56.6,71.3 56.9,71.6 57,71.7 67.4,71.7 67.5,71.7 67.9,71.3 67.9,66.1 59.2,57.4 41.1,57.4 39.7,57.4 39.6,57.5 39.6,58 39.7,58.1
VOUT on Top Layer "Top Layer-No Net" (solid, remove dead copper, pour order 58): 29.9,56.6 32,56.6 32.1,56.5 32.1,56 32,55.9 29.7,55.9 29.5,55.9 26.4,52.8 1.2,52.8 0.5,53.5 0.5,55.8 0.5,57.7 0.5,77 1,77.5 2.7,77.5 4,77.5 13.6,77.5 15,77.5 24.6,77.5 32.3,77.5 72,77.5 72.5,77 72.5,53.5 72,53 48.7,53 47.4,54.3 45.2,54.3 44.4,54.3 42.8,55.9 39.7,55.9 39.6,56 39.6,56.5 39.7,56.6 42.7,56.6 43.2,56.6 44.1,55.7 46.7,55.7 47.9,56.9 59.3,56.9 59.4,56.9 60.2,57.7 68.4,65.9 68.4,67.3 68.4,71.3 68.4,71.7 67.8,72.3 65.2,72.3 58.2,72.3 46.1,72.3 45.4,71.6 45.4,70.9 45.4,68.9 45.4,64.3 45,63.9 43.7,63.9 42.7,62.9 42.7,61.1 42.5,60.9 39.9,60.9 39.7,60.9 39.6,61 39.6,61.5 39.6,62.1 40.2,62.7 40.2,66.6 39.9,66.9 31.8,66.9 31.5,66.6 31.5,62.7 32.1,62.1 32.1,61 32,60.9 29.7,60.9 29.6,61 29.6,61.1 29.6,62.7 28.4,63.9 28.3,64 27.2,64 26.9,64.3 26.9,71.6 26.2,72.3 6.1,72.3 5.3,71.5 5.3,58.4 6.7,57 6.8,56.9 7.7,56.9 22.6,56.9 24.3,55.2 26.7,55.2 27.3,55.2 28.7,56.6
+12V on Top Layer "Top Layer-No Net" (solid, remove dead copper, pour order 45): 60.6,12 62.4,12 62.9,12 64.4,10.5 65,10.5 68.6,10.5 69,10.5 69.1,10.5 69.3,10.3 69.3,9.3 69.3,8.8 69.1,8.6 64.3,8.6 64.1,8.4 63.8,8.1 60.6,8.1
NetJ2_1 on Top Layer "Top Layer-No Net" (solid, remove dead copper, pour order 47): 30.4,18.6 34.9,18.6 35.1,18.4 35.2,18.3 35.2,16.9 35.2,15.1 34.6,14.5 33.4,13.3 30.3,10.2 30.3,9.7 30.3,1.8 29.9,1.4 25.3,1.4 25,1.7 25,8.7 25,11.9 29.1,16 29.3,16.2 29.3,16.7 29.3,18.3 29.6,18.6
VBAT on Top Layer "Top Layer-No Net" (solid, remove dead copper, pour order 50): 21.5,34 26,34 31,29 34.5,29 35,28.5 35,21 34.5,20.5 33.4,20.5 31.8,20.5 31.3,21 31.3,23.6 29,25.9 27.3,27.6 24.2,27.6 19.9,27.6 18.2,27.6 17.8,27.2 17.8,26.6 17.8,24.7 17.4,24.3 9.8,24.3 9.4,24.7 8.6,25.5 5.8,25.5 5.7,25.5 5.4,25.2 5.4,24.1 5.4,23 5.6,22.8 5.9,22.5 5.9,22.2 5.9,20.9 5.8,20.8 5.7,20.8 5,20.8 4.9,20.9 4.9,22.5 4.7,22.7 3.9,22.7 2.3,22.7 1.9,23.1 1.9,33.5 2.4,34
+3.3V on Top Layer "Top Layer-No Net" (solid, remove dead copper, pour order 53): 16.2,21.2 20.8,21.2 21.2,21.2 21.5,20.9 21.5,17.6 21.2,17.3 19.7,17.3 15.2,17.3 14.9,17.6 14.9,20.9 15.2,21.2
+3.3V on Top Layer "Top Layer-No Net" (solid, remove dead copper, pour order 55): 5.8,7 9.7,7 10.5,7 10.8,6.7 10.8,6.2 10.7,6.1 10,6.1 8.2,6.1 7.7,5.6 5.8,5.6 5.1,4.9 3.9,4.9 3.2,4.9 3,5.1 3,6.8 3.2,7
BGND on Top Layer "Top Layer-No Net" (solid, remove dead copper, pour order 59): 8.4,41.6 15.5,41.6 15.9,41.2 15.9,38 16.7,37.2 16.8,37.1 16.8,36.4 16.8,34.9 16.5,34.6 2.5,34.6 2.2,34.9 1.9,35.2 1.9,41.3 2.2,41.6
BGND on Top Layer "Top Layer-No Net" (solid, remove dead copper, pour order 60): 35.5,14.7 30.8,10 30.8,9 30.8,1.8 31,1.6 31.2,1.4 43.3,1.4 43.6,1.7 43.6,13.5 42.4,14.7 35.5,14.7
+3.3V on Top Layer "Top Layer-No Net" (solid, remove dead copper, pour order 61): 18.7,27 19.8,27 20,26.8 20,22.7 20,22.4 21.2,21.2 21.5,20.9 16.6,20.9 16.6,21.2 17.4,22 18.2,22.8 18.4,23 18.4,26.8 18.6,27
BGND on Top Layer "Top Layer-No Net" (solid, remove dead copper, pour order 62): 21.3,27 23.1,27 23.8,27 24,26.8 24,24.1 23.8,23.9 20.9,23.9 20.7,24.1 20.7,26.8 20.9,27
BGND on Top Layer "Top Layer-No Net" (solid, remove dead copper, pour order 63): 13.5,23.8 15,23.8 15.2,23.6 15.2,21.8 15.2,21.6 14.7,21.1 14.6,21 14.6,19.1 14.6,17.8 14.4,17.6 13,17.6 12.5,17.6 12.3,17.8 12.3,23.6 12.5,23.8
BGND on Top Layer "Top Layer-No Net" (solid, remove dead copper, pour order 64): 5.25,19.4 5.55,19.4 5.65,19.4 5.75,19.286 5.85,19.171 5.85,18.371 5.85,16.314 5.75,16.2 5.45,16.2 5.05,16.2 4.95,16.314 4.95,19.171 5.05,19.286 5.15,19.4
BGND on Top Layer "Top Layer-No Net" (solid, remove dead copper, pour order 65): 5.9,4.9 7.8,4.9 8,4.7 8,2.8 7.8,2.6 3.4,2.6 3.2,2.6 3,2.8 3,4.3 3.2,4.5 5.5,4.5 5.9,4.9
BGND on Top Layer "Top Layer-No Net" (solid, remove dead copper, pour order 67): 2.2,41.6 1.2,41.6 1,41.6 0.6,41.2 0.6,35 0.6,34.9 0.9,34.6 2.5,34.6 2.5,41.6
VBAT on Top Layer "Top Layer-No Net" (solid, remove dead copper, pour order 68): 2.4,34 0.9,34 0.5,33.6 0.5,23.1 0.9,22.7 2.3,22.7
GND on Top Layer "Top Layer-No Net" (solid, remove dead copper, pour order 69): 1.9,48.5 1.2,48.5 1,48.5 0.5,48 0.5,43.8 0.5,42.8 0.5,42.7 0.5,42.6 0.5,42.5 0.9,42.1 1,42.1 6.1,42.1 25.7,42.1 27.1,43.5 28.9,45.3 30.7,45.3 42.7,45.3 42.8,45.3 43.2,44.9 43.2,43.2 43.5,42.9 56.8,42.9 57.1,43.2 57.1,47.3 59.1,49.3 59.1,51.2 59.1,51.3 58.8,51.6 51.3,51.6 51,51.3 49.5,49.8 48.6,49.8 44.4,49.8 44,49.4 44,48.5 44,48.4 43.7,48.1 41.6,48.1 41.3,48.4 41.3,48.9 41.3,49.2 41,49.5 40.3,49.5 40.2,49.5 39.9,49.8 39.7,50 39.7,51.6 39.7,51.7 39.9,51.9 41.5,51.9 41.8,51.9 42,52.1 42,52.8 42,53 41.9,53.1 39.9,53.1 39.5,53.1 39.3,53.3 39.2,53.4 39.1,53.5 39.1,57.3 39.1,62.3 39.8,63 39.8,64.2 39.8,66.3 39.6,66.5 36.3,66.5 32.2,66.5 32,66.3 32,62.9 32.3,62.6 32.7,62.2 32.7,53.4 32.4,53.1 29.7,53.1 29.4,52.8 29.4,52.5 29.4,48 29,47.6 27.5,47.6 26.5,48.6 25.6,49.5 22.9,49.5 22.7,49.5 21.3,50.9 16,50.9 11.4,50.9 10.9,50.4 10.9,45.4 10.6,45.1 7.4,45.1 7.1,45.4 7.1,46.5 7.1,48.1 6.7,48.5
GND on Top Layer "Top Layer-No Net" (solid, remove dead copper, pour order 70): 30.1,59.1 32.4,59.1 33,59.1 33,58.4 29.6,58.4 29.5,58.5 29.5,58.9 29.5,59 29.6,59.1
GND on Top Layer "Top Layer-No Net" (solid, remove dead copper, pour order 71): 40.6,59.1 42,59.1 42.1,59.1 42.2,59 42.2,58.8 42.2,58.5 42.1,58.4 41.7,58.4 38.6,58.4 38.6,59.1
GND on Top Layer "Top Layer-No Net" (solid, remove dead copper, pour order 72): 45.9,53.6 47.4,53.6 48.4,52.6 48.4,52.2 48.4,52.1 48.2,51.9 48.1,51.8 47,51.8 45.4,51.8 45.2,52 45.2,53.3 45.2,53.4 45.4,53.6
GND on Top Layer "Top Layer-No Net" (solid, remove dead copper, pour order 73): 25.7,37.1 24,37.1 23.7,37.1 23.3,36.7 23.3,36.1 23.3,35 23.6,34.7 26.3,34.7 28.2,32.8 31.4,29.6 31.7,29.6 53.1,29.6 53.5,30 53.5,35.4 53.1,35.8 37.5,35.8 36.3,37 36.2,37.1 35.6,37.1
VBAT on Top Layer "Top Layer-No Net" (solid, remove dead copper, pour order 74): 34.5,29 39.7,29 41.7,27 41.7,21.6 41.7,20.9 41.3,20.5 35.9,20.5 34.5,20.5
GND on Top Layer "Top Layer-No Net" (solid, remove dead copper, pour order 75): 61,41.5 61.4,41.5 61.5,41.4 61.5,40.7 61.5,39.5 61.9,39.1 66,39.1 66.7,39.1 67,38.8 67,36.4 66.7,36.1 58.7,36.1 58.4,36.4 58.4,38.6 58.7,38.9 60.1,38.9 60.3,38.9 60.6,39.2 60.6,41.4 60.7,41.5
GND on Top Layer "Top Layer-No Net" (solid, remove dead copper, pour order 76): 46.7,20.7 47.4,20.7 47.6,20.7 48,20.3 48,19.5 48,18.1 48.7,17.4 48.7,16.7 48.7,16.2 48.4,15.9 48.3,15.8 47.2,15.8 46.4,15.8 46,16.2 46,20.1 46,20.4 46.3,20.7
GND on Top Layer "Top Layer-No Net" (solid, remove dead copper, pour order 77): 49.8,20.6 52.1,20.6 52.7,20.6 52.9,20.4 52.9,19.3 52.9,18.9 52.7,18.7 50.4,18.7 50.2,18.7 49.9,19 49.4,19.5 49.4,19.9 49.4,20.3 49.7,20.6
GND on Top Layer "Top Layer-No Net" (solid, remove dead copper, pour order 78): 59.4,20.5 62.9,20.5 63.1,20.3 63.1,18.9 63.1,18.1 62.9,17.9 62,17.9 59,17.9 58.8,18.1 58.8,19.6 58.8,20.3 59,20.5
GND on Top Layer "Top Layer-No Net" (solid, remove dead copper, pour order 79): 68.1,17.9 70,17.9 72,17.9 72.1,17.8 72.5,17.4 72.5,17.3 72.5,9 72.2,8.7 70,8.7 69.8,8.9 69.8,10.3 69.1,11 67.6,12.5 67.6,17.4 67.6,17.6 67.9,17.9
GND on Top Layer "Top Layer-No Net" (solid, remove dead copper, pour order 80): 47.5,13.1 51.6,13.1 53.3,13.1 54.7,11.7 54.7,9.7 54.7,8 55.1,7.6 57.4,7.6 57.5,7.6 57.9,7.2 57.9,1.7 57.6,1.4 44.5,1.4 44.2,1.7 44.2,10.6 46.7,13.1
BGND on Bottom Layer "Top Layer-No Net" (solid, remove dead copper, pour order 57): 0.5,42 1,42.5 15.9,42.5 22.5,42.5 23.5,41.5 23.5,31.7 27.2,28 32.2,23 32.2,19.2 32.2,16 33.5,14.7 42.4,14.7 43.6,13.5 43.6,1.1 43,0.5 1.5,0.5 0.5,1.5 0.5,42 0.8,42.3
GND on Bottom Layer "Top Layer-No Net" (solid, remove dead copper, pour order 66): 1,43.1 0.5,43.6 0.5,46.6 0.5,50.7 0.5,99 1,99.5 72,99.5 72.5,99 72.5,97.4 72.5,1 72,0.5 44.8,0.5 44.4,0.9 44.2,1.1 44.2,2.1 44.2,7.5 44.2,13.8 43.2,14.8 42.7,15.3 42.2,15.3 34.6,15.3 33.8,15.3 33.5,15.6 32.8,16.3 32.8,16.8 32.8,22 32.8,23.2 32.3,23.7 30.3,25.7 24.1,31.9 24.1,32.2 24.1,40.1 24.1,41.7 23.2,42.6 22.7,43.1 22.3,43.1

## Keep-outs
Keep-Out Layer:
  the board outline again, w0.254

## Silkscreen, mask and mechanical layers (free items; w line width, h text height)
Top Overlay:
  text "SPTB-A0" at 54.9,94.4 h1.52
  text "PV+" at 29.7,84.2 h1.52
  text "PV-" at 37.6,84.2 h1.52
  text "BAT-" at 5,42.8 h1.2
  text "BAT+" at 15.2,28.3 h1.2 r90
  text "LOAD+" at 25.3,13.6 h1.2
  text "LOAD-" at 33.2,13.6 h1.2